# Altium PCB Oximeter.PcbDoc
Units mm, origin at the board's own origin, x right, y up, seen from the top; angles counter-clockwise.
Board outline 64.26 x 36 mm, 2 copper layers (Top Layer, Bottom Layer); 59 components, 39 nets, 184 pads, 24 vias.
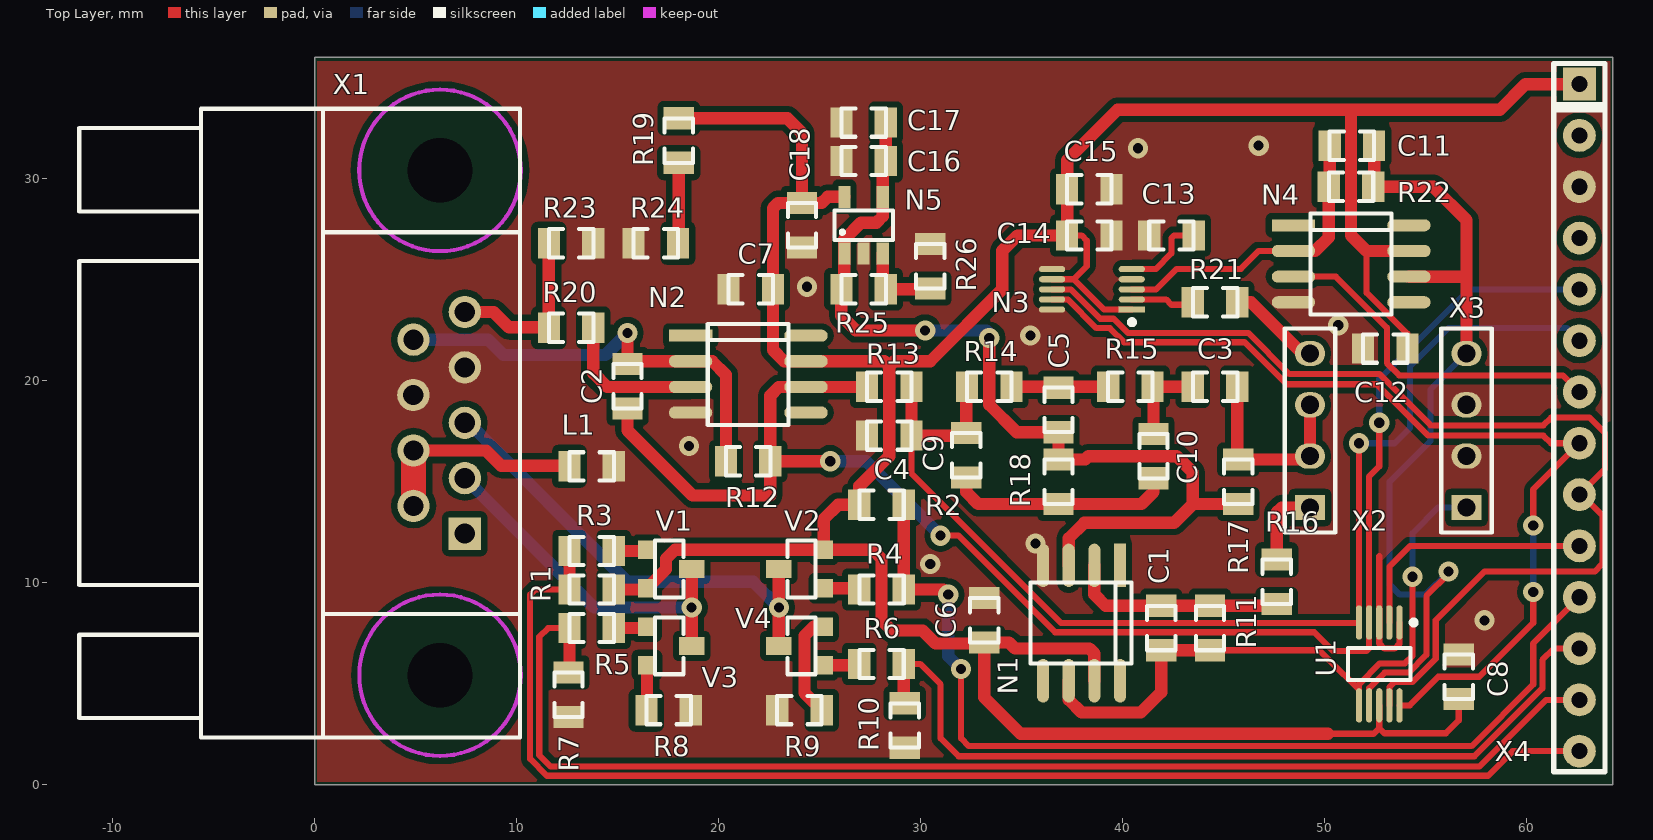
[diagram p0: Top Layer view]
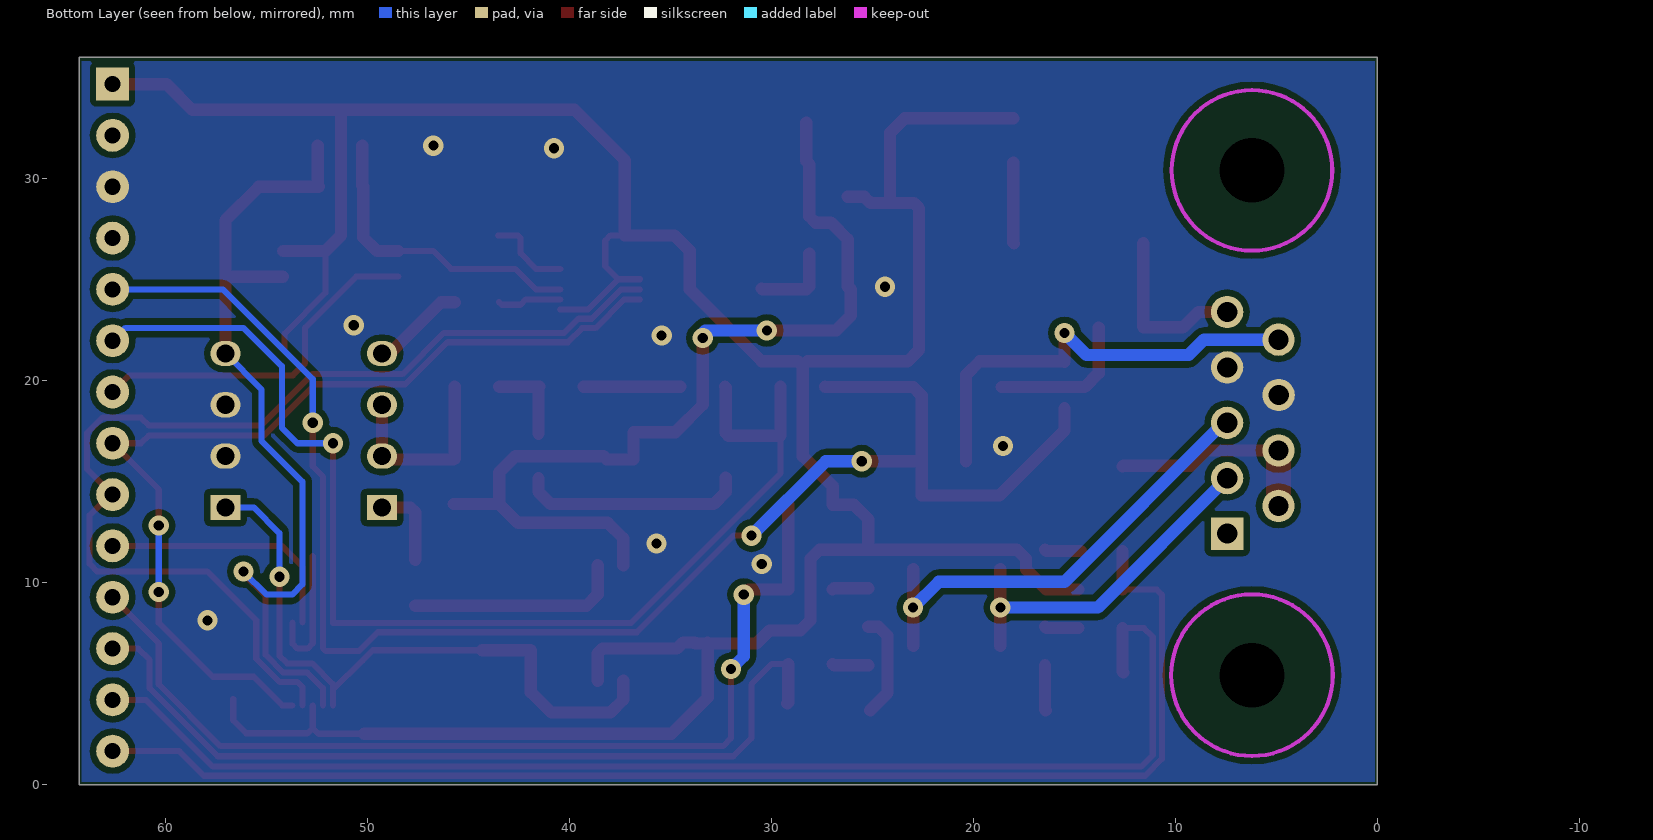
[diagram p1: Bottom Layer view, seen from below]

## Layer stack, top to bottom
Top Solder: solder mask 0.0102, Solder Resist, Dk 3.5
Top Layer: signal copper 0.0356
Dielectric 1: dielectric 0.32, FR-4, Dk 4.8
Bottom Layer: signal copper 0.0356
Bottom Solder: solder mask 0.0102, Solder Resist, Dk 3.5

## Board outline
0,0 0,36 64.262,36 64.262,0

## Design rules (kind name [scope] priority, off if disabled: settings)
Clearance [All] p1: gap=0.152 ignorepadtopadclearanceinfootprint=FALSE
DiffPairsRouting [All] p1: maxlimit=10 minlimit=0.125 mostfreqgap=0.15 toplayer_minwidth=0.381 toplayer_maxwidth=0.381 toplayer_prefwidth=0.381 bottomlayer_minwidth=0.381 bottomlayer_maxwidth=0.381 bottomlayer_prefwidth=0.381 maxuncoupledlength=12.7
FabricationTestPointUsage FabricationTestPointUsage_1 [All] p1: valid=0 allowmultiple=FALSE
FabricationTestpoint FabricationTestpoint_1 [All] p1: side=3 testpointundercomponent=TRUE minsize=1.016 maxsize=2.54 preferedsize=1.524 minholesize=0 maxholesize=1.016 preferedholesize=0.813 testpointgrid=0.025 allowsidetop=TRUE allowsidebottom=TRUE usegrid=TRUE gridtolerance=0
HoleSize [All] p1: absolutevalues=TRUE maxlimit=6 minlimit=0.33 maxpercent=80.000 minpercent=20.000
HoleSize FabricationTestpoint [All] p2 off: absolutevalues=TRUE maxlimit=2.54 minlimit=0.025 maxpercent=80.000 minpercent=20.000
HoleSize FabricationTestPointUsage [All] p3 off: absolutevalues=TRUE maxlimit=2.54 minlimit=0.025 maxpercent=80.000 minpercent=20.000
MinimumAnnularRing [All] p1: minimumring=0.178
PlaneClearance [All] p1: clearance=0.914
PlaneConnect [All] p1: planeconnectstyle=Relief reliefexpansion=0.4 reliefentries=4 reliefconductorwidth=0.15 reliefairgap=0.15
PolygonConnect [All] p1: connectstyle=Direct reliefconductorwidth=0.15 reliefentries=4 polygonreliefangle="90 Angle" airgapwidth=0.254
RoutingCorners [All] p1: cornerstyle=45-Degree minsetback=1.25 maxsetback=1.25
RoutingVias [All] p1: holewidth=0.6 width=0.8 viastyle="Through Hole" minholewidth=0.33 minwidth=0.508 maxholewidth=0.8 maxwidth=12
SolderMaskExpansion [All] p1: expansion=0.075
Width [All] p1: maxlimit=2.438 minlimit=0.152 preferedwidth=0.305
23 further rules are at their usual default settings.

## Components (designator, comment, footprint, x,y, rotation, side; value= is the part's Value field where it differs from the comment)
C1 "5n4_0805" 0805MIL 41.91,7.747 r270 top
C2 "270pF_0805" 0805MIL 15.494,19.719 r270 top
C3 "10uF_10V_GRM21" 0805MIL 44.577,19.685 r0 top
C4 "10uF_10V_GRM21" 0805MIL 28.448,17.272 r180 top
C5 "220nF_0805" 0805MIL 36.83,18.542 r270 top
C6 "100nF_0805" 0805MIL 33.147,8.128 r270 top
C7 "100nF_0805" 0805MIL 21.59,24.511 r0 top
C8 "100nF_0805" 0805MIL 56.642,5.334 r270 top
C9 "100nF_0805" 0805MIL 32.258,16.299 r270 top
C10 "100nF_0805" 0805MIL 41.529,16.256 r90 top
C11 "5n4_0805" 0805MIL 51.351,31.623 r0 top
C12 "100nF_0805" 0805MIL 53.001,21.579 r0 top
C13 "1uF_0805_100V" 0805MIL 42.418,27.178 r180 top
C14 "10uF_10V_GRM21" 0805MIL 38.354,27.178 r0 top
C15 "100nF_0805" 0805MIL 38.354,29.464 r0 top
C16 "10uF_10V_GRM21" 0805MIL 27.178,30.861 r180 top
C17 "100nF_0805" 0805MIL 27.178,32.766 r0 top
C18 "100nF_0805" 0805MIL 24.13,27.686 r90 top
L1 "39E" 0805MIL 13.716,15.748 r0 top
N1 "OPA333" SOP8_150_65 37.973,8.001 r180 top
N2 "OPA333" SOP8_150_65 21.463,20.32 r270 top
N3 "AD5272" MSOP10 38.481,24.511 r90 top
N4 "OPA333" SOP8_150_65 51.308,25.781 r270 top
N5 "TLV2371IDBVR" SOT23-5 27.178,27.689 r0 top
R1 "10K_0805C" 0805MIL 13.716,9.652 r180 top
R2 "10K_0805C" 0805MIL 28.067,13.843 r0 top
R3 "1K_0805C" 0805MIL 13.716,11.557 r180 top
R4 "1K_0805C" 0805MIL 28.067,9.652 r180 top
R5 "27K_0805C" 0805MIL 13.716,7.747 r180 top
R6 "27K_0805C" 0805MIL 28.067,5.969 r180 top
R7 "10K_0805C" 0805MIL 12.573,4.445 r270 top
R8 "20E_0805C" 0805MIL 17.526,3.683 r0 top
R9 "20E_0805C" 0805MIL 24.003,3.683 r180 top
R10 "10K_0805C" 0805MIL 29.21,2.921 r270 top
R11 "6M8_0805C" 0805MIL 44.323,7.747 r90 top
R12 "4M7_0805C" 0805MIL 21.463,16.002 r180 top
R13 "3K9_0805C" 0805MIL 28.448,19.685 r180 top
R14 "33K_0805C" 0805MIL 33.401,19.685 r180 top
R15 "33K_0805C" 0805MIL 40.386,19.685 r180 top
R16 "150K_0805C" 0805MIL 47.625,10.033 r90 top
R17 "33K_0805C" 0805MIL 45.72,14.986 r270 top
R18 "15K_0805C" 0805MIL 36.83,14.986 r270 top
R19 "10K_0805C" 0805MIL 18.034,31.877 r270 top
R20 "0E0_0805C" 0805MIL 12.7,22.606 r180 top
R21 "56K_0805C" 0805MIL 44.577,23.876 r180 top
R22 "6M8_0805C" 0805MIL 51.308,29.591 r180 top
R23 "0E0_0805C" 0805MIL 12.7,26.797 r0 top
R24 "1K2_0805C" 0805MIL 16.891,26.797 r180 top
R25 "10K_0805C" 0805MIL 27.178,24.511 r0 top
R26 "10K_0805C" 0805MIL 30.48,25.654 r90 top
U1 "ADS1115IDGST" TI-DGS10_N 52.705,5.969 r270 top
V1 "BC807-25" SOT23 17.653,10.668 r270 top
V2 "BC807-25" SOT23 24.003,10.668 r90 top
V3 "MMBT3904" SOT23 17.653,6.858 r270 top
V4 "MMBT3904" SOT23 24.003,6.858 r90 top
X1 "D-SUB9_S_ABG" DSUB_9_F_ABG 2.54,17.907 r270 top
X2 "SL1-053-04G" SL105304 49.276,13.716 r90 top
X3 "SL1-053-04G" SL105304 57.023,13.716 r90 top
X4 "X-14P" SIP14 62.611,34.671 r270 top

## Footprints (in the part's own frame and the unit in brackets; to place one, negate y for a bottom-side part, rotate by r counter-clockwise, add the part's x,y. Pads: shape width x height; smd on the part's side, far side on the other; paste and mask are expansions set on the pad)
0805MIL [mm] "0805MIL"
  rect 1.1x1.5 smd: 1(-1.1,0) 2(1.1,0)
  silkscreen extent -1.1,-0.7 1.1,0.7, body extent -1.1,-0.7 1.1,0.7, height 0.6
DSUB_9_F_ABG [mm] "DSUB_9_F_ABG"
  rect 1.6x1.6 hole 1: 1(5.487,4.9)
  round 1.6 hole 1: 2(2.744,4.9) 3(0.001,4.9) 4(-2.743,4.9) 5(-5.486,4.9) 6(4.115,2.36) 7(1.372,2.36) 8(-1.371,2.35) 9(-4.114,2.36)
  round 0 hole 3.2: ""(-12.496,3.672)
  round 0 hole 3.2 unplated: ""(12.497,3.672)
  Top Layer keep-out circle w0.2: c12.497,3.672 r3.997
  Top Layer keep-out circle w0.2: c-12.496,3.672 r4
  Bottom Layer keep-out circle w0.2: c12.497,3.672 r4
  Bottom Layer keep-out circle w0.2: c-12.496,3.672 r3.974
  silkscreen extent -15.54,-14.19 15.57,7.64, body extent -15.47,-14.17 15.43,7.62, height 13.65
MSOP10 [mm] "MSOP10"
  rect 0.3x1.3 smd: 1(-1,-1.975)
  oval 0.3x1.3 smd: 2(-0.5,-1.975) 3(0,-1.975) 4(0.5,-1.975) 5(1,-1.975) 6(1,1.975) 7(0.5,1.975) 8(0,1.975) 9(-0.5,1.975) 10(-1,1.975)
  silkscreen extent -1.75,-2.11 -1.5,-1.86, body extent -1.5,-2.46 1.5,2.46, height 1.2
SIP14 [mil]
  rect 64x64 hole 31.5: 1(0,0)
  round 64 hole 31.5: 2(100,0) 3(200,0) 4(300,0) 5(400,0) 6(500,0) 7(600,0) 8(700,0) 9(800,0) 10(900,0) 11(1000,0) 12(1100,0) 13(1200,0) 14(1300,0)
  silkscreen extent -40,-50 1340,50
SL105304 [mm] "SL105304"
  rect 1.25x1.5 hole 0.9: 1(0,0)
  oval 1.25x1.5 hole 0.9: 2(2.54,0) 3(5.08,0) 4(7.62,0)
  silkscreen extent -1.25,-1.25 8.85,1.25, body extent -1.28,-1.25 8.88,1.25, height 8.1
SOP8_150_65 [mm] "SOP8_150_65"
  rect 0.6x2.15 smd: 1(-1.9,-2.85)
  oval 0.6x2.15 smd: 2(-0.63,-2.85) 3(0.64,-2.85) 4(1.91,-2.85) 5(1.91,2.865) 6(0.64,2.865) 7(-0.63,2.865) 8(-1.9,2.865)
  silkscreen extent -2.47,-2 2.52,2, body extent -2.47,-3.07 2.53,3.12, height 1.73
SOT23 [mm] "SOT23"
  rect 0.9x0.9 smd: 1(-0.95,-1.2) 2(0.955,-1.2)
  rect 0.9x1.25 smd: 3(0.002,1.022)
  silkscreen extent -1.4,-0.8 1.4,0.6, body extent -1.46,-1.27 1.46,1.07, height 0.99
SOT23-5 [mm] "SOT23-5"
  rect 0.6x1.1 smd: 1(-0.95,-1.4) 2(0,-1.4) 3(0.95,-1.4) 4(0.95,1.4) 5(-0.95,1.4)
  silkscreen extent -1.44,-0.72 1.45,0.72, body extent -1.5,-1.5 1.5,1.5, height 1.47
TI-DGS10_N [mm] "SOP, 10-Leads, Body 3x3mm, Pitch 0.5mm, IPC Medium Density"
  oval 1.7x0.3 smd: 1(-2.05,1) 2(-2.05,0.5) 3(-2.05,0) 4(-2.05,-0.5) 5(-2.05,-1) 6(2.05,-1) 7(2.05,-0.5) 8(2.05,0) 9(2.05,0.5) 10(2.05,1)
  silkscreen extent -2.17,-1.55 0.8,1.83, body extent -1.55,-1.55 1.55,1.55, height 1.1

## Part data
C1 C11: library part 2506.1521, "Kond.Keramik SMD Typ X7R 2,2nF B37941-K5222-K60 0805", Manufacturer=Epcos, Supplier Part Number 1="83 06 56", Tolerance=10%, Voltage=50V, #Footprint Old#=0805MIL, ComponentLink1Description=Datasheet, ComponentLink1URL=P:\Datasheets\Kondensatoren\B37xxkeramik.pdf, IEC=CKE, Part Grp=VIII, Part Number=2506.1521, Part Type=Keramik\SMD, ROHS=Nein, SMD=Ja, Supplier 1=Distrelec
C2: library part 2506.1509, "Kond.Keramik Siemens Typ COG SMD 0805", Manufacturer=Siemens, #Footprint Old#=0805MIL, ComponentLink1Description=Datasheet, ComponentLink1URL=P:\Datasheets\Kondensatoren\KERKOND.pdf, IEC=CKE, Part Grp=VIII, Part Number=2506.1509, Part Type=Keramik\SMD, ROHS=Nein, SMD=Ja
C3 C4 C14 C16: library part 2541.8615, "Monolithic Ceramic Capacitor 10uF/10V GRM21BR61A106KE19L", Manufacturer=MyRata, Manufacturer Part Nr=GRM21BR61A106KE19L, Supplier Part Number 1="82 35 11", Tolerance=10%, Voltage=10V, #Footprint Old#=0805MIL, ComponentLink1Description=Datasheet, ComponentLink1URL=P:\Datasheets\Kondensatoren\GRM319.pdf, IEC=CKE, Part Grp=VIII, Part Number=2541.8615, Part Type=Keramik\SMD, ROHS=Nein, SMD=Ja, Supplier 1=Distrelec
C5: library part 2506.1529, "Kond.Keramik Siemens Typ X7R SMD 0805", Manufacturer=Siemens, Supplier Part Number 1="83 14 67", #Footprint Old#=0805MIL, ComponentLink1Description=Datasheet, ComponentLink1URL=P:\Datasheets\Kondensatoren\KERKOND.pdf, IEC=CKE, Part Grp=VIII, Part Number=2506.1529, Part Type=Keramik\SMD, ROHS=Nein, SMD=Ja, Supplier 1=Distrelec
C6 C7 C8 C9 C10 C12 C15 C17 C18: library part 2504.0981, "Kond.Keramik Typ X7R SMD 0805 100nF", Manufacturer=Kemet, Supplier Part Number 1="83 14 69", Tolerance=10%, Voltage=50V, #Footprint Old#=0805MIL, ComponentLink1Description=Datasheet, ComponentLink1URL=P:\Datasheets\Kondensatoren\Kemet-keramik.pdf, IEC=CKE, Part Grp=VIII, Part Number=2504.0981, Part Type=Keramik\SMD, ROHS=Nein, SMD=Ja, Supplier 1=Distrelec
C13: library part 2567.7027, "Kond.Keramik TDK Typ X7S SMD 0805 1uF/100V", Manufacturer=TDK, Manufacturer Part Nr=C2012X7S2A105K125AB, Max Operating Temp=125, Min Operating Temp=-55, Supplier Part Number 1=211-2709, ComponentLink1Description=Datasheet, ComponentLink1URL=P:\Datasheets\Kondensatoren\TDK_CHIP.pdf, IEC=CKE, Part Number=2567.7027, Part Type=Keramik, ROHS=Ja, SMD=Ja, Supplier 1=Farnell
L1: library part 2571.6206, "SMD Ferrit MPZ2012S331A 330Ohm", Manufacturer=TDK, Manufacturer Part Nr=MPZ2012S331A, Max Operating Temp=125, Min Operating Temp=-55, Supplier Part Number 1=810-MPZ2012S331AT000, ComponentLink1Description=Datasheet, ComponentLink1URL="P:\Datasheets\Ferrite\TDK_MPZ Serie.pdf", IEC=LFE, Part Grp=V, Part Number=2571.6206, Part Type=Ferrit, ROHS=Ja, SMD=Ja, Supplier 1=Mouser
N1 N2 N4: library part 2564.2212, "SMD Low Power Precision Op.Amp. OPA211AIDR SOIC8", Manufacturer="Texas Instruments", Manufacturer Part Nr=OPA211AIDR, Max Operating Temp=150, Min Operating Temp=-55, #Footprint Old#=SOIC_8, ComponentLink1Description=Datasheet, ComponentLink1URL=P:\Datasheets\Analoge_Schaltungen\OPA211.pdf, IEC=NOP, NC=1,5,8, Part Grp=I, Part Number=2564.2212, Part Type=Signalverarbeitung\Operationsverstaerker, ROHS=Ja, SMD=Ja, Supplier 1=Digikey, Supplier Part Number 1=OPA211AIDR
N3: library part N-AD5272, "Digitalpotentiometer 1024tap 100k", Text Field1="Op.Amp. / Offset corr.n / Freqency comp."
N5: library part 8015.8017, "3MHz Rail-to-Rail OpAmp TLV2371IDBVR SOT23-5", Manufacturer="Texas Instruments", Supplier Part Number 1=595-TLV2371IDBVR, ComponentLink1Description=Datasheet, ComponentLink1URL=P:\Datasheets\Analoge_Schaltungen\TLV2371.pdf, IEC=NOP, Manufacturer Part Nr=TLV2371IDBVR, Part Grp=I, Part Number=8015.8017, Part Type=Signalverarbeitung\Operationsverstaerker, ROHS=Ja, SMD=Ja, Supplier 1=Mouser
R1 R2 R7 R10 R19 R25 R26: library part 2522.1838, "Widerst.Chip SMD 1% 0.1W 0805 Serie HMWA 10 kOhm", Manufacturer="Royal Ohm", Supplier Part Number 1=911-975, #Footprint Old#=0805MIL, ComponentLink1Description=Datasheet, ComponentLink1URL=P:\Datasheets\Widerstaende\Chip_0805.pdf, IEC=RSH, Part Grp=XII, Part Number=2522.1838, Part Type=Schichtwiderstand\SMD, ROHS=Nein, SMD=Ja, Supplier 1=Farnell
R3 R4: library part 2522.1806, "Widerst.Chip SMD 1% 0.1W 0805 Serie HMWA 1 kOhm", Manufacturer="Royal Ohm", Supplier Part Number 1=911-859, #Footprint Old#=0805MIL, ComponentLink1Description=Datasheet, ComponentLink1URL=P:\Datasheets\Widerstaende\Chip_0805.pdf, IEC=RSH, Part Grp=XII, Part Number=2522.1806, Part Type=Schichtwiderstand\SMD, ROHS=Nein, SMD=Ja, Supplier 1=Farnell
R5 R6: library part 2522.1849, "Widerst.Chip SMD 1% 0.1W 0805 Serie HMWA 27 kOhm", Manufacturer="Royal Ohm", Supplier Part Number 1=912-025, #Footprint Old#=0805MIL, ComponentLink1Description=Datasheet, ComponentLink1URL=P:\Datasheets\Widerstaende\Chip_0805.pdf, IEC=RSH, Part Grp=XII, Part Number=2522.1849, Part Type=Schichtwiderstand\SMD, ROHS=Nein, SMD=Ja, Supplier 1=Farnell
R8 R9: library part 2544.3651, "Widerst.Chip SMD 0.1% 0.1W 0805 Serie RN73 20 Ohm", Manufacturer=TYCO/Holsworthy, Supplier Part Number 1=114-0651, #Footprint Old#=0805MIL, ComponentLink1Description=Datasheet, ComponentLink1URL=P:\Datasheets\Widerstaende\Chip_0805_RN73.pdf, IEC=RSH, Part Grp=XII, Part Number=2544.3651, Part Type=Schichtwiderstand\SMD, ROHS=Nein, SMD=Ja, Supplier 1=Farnell
R11 R12 R22: library part 2522.1895, "Widerst.Chip SMD 1% 0.1W 0805 Serie HMWA 1 MOhm", Manufacturer="Royal Ohm", Supplier Part Number 1=912-219, #Footprint Old#=0805MIL, ComponentLink1Description=Datasheet, ComponentLink1URL=P:\Datasheets\Widerstaende\Chip_0805.pdf, IEC=RSH, Part Grp=XII, Part Number=2522.1895, Part Type=Schichtwiderstand\SMD, ROHS=Nein, SMD=Ja, Supplier 1=Farnell
R13: library part 2522.1824, "Widerst.Chip SMD 1% 0.1W 0805 Serie HMWA 3,9 kOhm", Manufacturer="Royal Ohm", Supplier Part Number 1=911-926, #Footprint Old#=0805MIL, ComponentLink1Description=Datasheet, ComponentLink1URL=P:\Datasheets\Widerstaende\Chip_0805.pdf, IEC=RSH, Part Grp=XII, Part Number=2522.1824, Part Type=Schichtwiderstand\SMD, ROHS=Nein, SMD=Ja, Supplier 1=Farnell
R14 R15 R17: library part 2522.1851, "Widerst.Chip SMD 1% 0.1W 0805 Serie HMWA 33 kOhm", Manufacturer="Royal Ohm", Supplier Part Number 1=912-037, #Footprint Old#=0805MIL, ComponentLink1Description=Datasheet, ComponentLink1URL=P:\Datasheets\Widerstaende\Chip_0805.pdf, IEC=RSH, Part Grp=XII, Part Number=2522.1851, Part Type=Schichtwiderstand\SMD, ROHS=Nein, SMD=Ja, Supplier 1=Farnell
R16: library part 2522.1871, "Widerst.Chip SMD 1% 0.1W 0805 Serie HMWA 150 kOhm", Manufacturer="Royal Ohm", Supplier Part Number 1=912-166, #Footprint Old#=0805MIL, ComponentLink1Description=Datasheet, ComponentLink1URL=P:\Datasheets\Widerstaende\Chip_0805.pdf, IEC=RSH, Part Grp=XII, Part Number=2522.1871, Part Type=Schichtwiderstand\SMD, ROHS=Nein, SMD=Ja, Supplier 1=Farnell
R18: library part 2522.1843, "Widerst.Chip SMD 1% 0.1W 0805 Serie HMWA 15 kOhm", Manufacturer="Royal Ohm", Supplier Part Number 1=911-999, #Footprint Old#=0805MIL, ComponentLink1Description=Datasheet, ComponentLink1URL=P:\Datasheets\Widerstaende\Chip_0805.pdf, IEC=RSH, Part Grp=XII, Part Number=2522.1843, Part Type=Schichtwiderstand\SMD, ROHS=Nein, SMD=Ja, Supplier 1=Farnell
R20 R23: library part 2524.7986, "Widerst.Chip SMD 1% 0.1W 0805 Serie HMWA 0Ohm", Manufacturer="Royal Ohm", Supplier Part Number 1=772-239, #Footprint Old#=0805MIL, ComponentLink1Description=Datasheet, ComponentLink1URL=P:\Datasheets\Widerstaende\Chip_0805.pdf, IEC=RSH, Part Grp=XII, Part Number=2524.7986, Part Type=Schichtwiderstand\SMD, ROHS=Nein, SMD=Ja, Supplier 1=Farnell
R21: library part 2522.1858, "Widerst.Chip SMD 1% 0.1W 0805 Serie HMWA 56 kOhm", Manufacturer="Royal Ohm", Supplier Part Number 1=912-062, #Footprint Old#=0805MIL, ComponentLink1Description=Datasheet, ComponentLink1URL=P:\Datasheets\Widerstaende\Chip_0805.pdf, IEC=RSH, Part Grp=XII, Part Number=2522.1858, Part Type=Schichtwiderstand\SMD, ROHS=Nein, SMD=Ja, Supplier 1=Farnell
R24: library part 2522.1809, "Widerst.Chip SMD 1% 0.1W 0805 Serie HMWA 1,2 kOhm", Manufacturer="Royal Ohm", Supplier Part Number 1=911-860, #Footprint Old#=0805MIL, ComponentLink1Description=Datasheet, ComponentLink1URL=P:\Datasheets\Widerstaende\Chip_0805.pdf, IEC=RSH, Part Grp=XII, Part Number=2522.1809, Part Type=Schichtwiderstand\SMD, ROHS=Nein, SMD=Ja, Supplier 1=Farnell
U1: "16-Bit ADC with Integrated Multiplexer, PGA, Comparator, Oscillator, and Reference, -40 to 125 degC, 10-pin SOP (DGS10), Green (RoHS & no Sb/Br)", Analog Voltage AV/DD(Max)(V)=5.5, Analog Voltage AV/DD(Min)(V)=2, Manufacturer="Texas Instruments", Supplier Part Number 1=ADS1253E/2K5G4-ND, # Input Channels=4, Architecture=Delta-Sigma, Code_JEDEC=MO-153, ComponentLink1Description="Manufacturer URL", ComponentLink1URL=http://www.ti.com/, ComponentLink2Description=Datasheet, ComponentLink2URL=http://www.ti.com/general/docs/lit/getliterature.tsp?genericPartNumber=ADS1115&fileType=pdf, ComponentLink3Description="Package Specification", ComponentLink3URL=http://www.ti.com/lit/ml/mpds035b/mpds035b.pdf, DatasheetVersion=SBAS444B, Digital Supply(Max)(V)=5.5, Digital Supply(Min)(V)=2, Eco-Plan="Green (RoHS & no Sb/Br)", INL(Max)(+/-LSB)=1, Interface="Serial I2C", Mounting Technology="Surface Mount", PackageDescription="10-Pin Plastic Small Outline, Body 3 x 3 mm, Pitch 0.5 mm", PackageReference=DGS10, PackageVersion="4073272/C, 02/2004", PartNumber=ADS1115IDGST, Resolution(Bits)=16, Sample Rate (max)(SPS)=860, SubFamily="Precision ADC (<=10MSPS)", Supplier 1=Digi-Key, Supplier 2=Mouser, Supplier Part Number 2=595-ADS1253E/2K5G4
V1 V2: library part 2110.8189, "PNP-Transistor SMD BC807-25 SOT-23", Manufacturer=NXP, Supplier Part Number 1=108-1221, #Footprint Old#=SOT23, ComponentLink1Description=Datasheet, ComponentLink1URL=P:\Datasheets\Diskrete_Halbleiter\BC807.pdf, IEC=VPN, Manufacturer Part Nr=BC807-25, Part Grp=III, Part Number=2110.8189, Part Type=Transistoren\PNP, ROHS=Ja, SMD=Ja, Supplier 1=Farnell
V3 V4: library part 2544.3690, "Transistor NPN MMBT3904 SOT-23", Manufacturer=Fairchild, Supplier Part Number 1=984-6727, #Footprint Old#=SOT23, ComponentLink1Description=Datasheet, ComponentLink1URL=P:\Datasheets\Diskrete_Halbleiter\MMBT3904.pdf, Date=07.09.2015, IEC=VNP, Name=rlegm, Part Grp=III, Part Number=2544.3690, Part Type=Transistoren\NPN, ROHS=Nein, SMD=Ja, Supplier 1=Farnell
X1: library part 2570.6888, "D-SUB 9 Sok 90° mit Winkel und Abstandsbolzen DT09SYC1M63UNB6", Manufacturer=Deltron, Manufacturer Part Nr=DT09SYC1M63UNB6, ComponentLink1Description=Datasheet, ComponentLink1URL=P:\Datasheets\Elektromechanik\Deltron_DSUB_ABG.pdf, IEC=XDS, Part Grp=IV, Part Number=2570.6888, Part Type=Steckerverbinder\D-SUB, ROHS=Ja, SMD=Nein, Supplier 1=Deltron, Supplier Part Number 1=DT09SYC1M63UNB6
X2 X3: library part 2552.7782, "2.54mm Stiftleiste 1reihig 4pol gerade SL1 053 04G", Manufacturer=Fischer, Max Operating Temp=105, Min Operating Temp=-40, Supplier Part Number 1="SL1 053 04G", #Footprint Old#=SL4X1_254, ComponentLink1Description=Datasheet, ComponentLink1URL=P:\Datasheets\Elektromechanik\SL1_053.pdf, IEC=XDI, Manufacturer Part Nr=SL1-053-04G, Part Grp=IV, Part Number=2552.7782, Part Type=Steckerverbinder, ROHS=Ja, SMD=Nein, Supplier 1=Astrel
X4: "Stiftenleiste 14 pin"

## Via types
v1: diameter 1, hole 0.5, Top Layer to Bottom Layer, 24 vias

## Nets (pads, with @x,y where several pads share a name; then routed paths per layer and width w, separated by ;. In a path a pad name is that pad's centre, name@x,y a point inside that pad or via, vN(x,y) a via of type N, cw(c..) or ccw(c..) an arc to the next point about the centre after c; other vN are vias at no path point)
Baseline: C4.1 C9.1 R13.1 R14.2 U1.5 X4.6 | length 58.8
  Top Layer w0.305: C4.1 29.548,15.41 36.966,7.992 U1.5@51.705,7.992 ; U1.5 v1(51.705,16.891)
  Top Layer w0.61: R13.1 C4.1 32.131,17.272 C9.1 32.258,19.642 R14.2
  Bottom Layer w0.305: v1(51.705,16.891) 53.467,16.891 54.229,17.653 54.229,20.701 56.134,22.606 61.976,22.606 X4.6
Current_IR: R6.1 R10.1 X4.12 | length 41.9
  Top Layer w0.305: R6.1 29.972,5.969 30.988,4.953 30.988,2.286 31.877,1.397 57.416,1.397 60.782,4.764 60.782,6.172 61.341,6.731 X4.12
  Top Layer w0.61: R6.1 29.167,4.064 R10.1
Current_Red: R5.2 R7.1 X4.13 | length 62.8
  Top Layer w0.305: R5.2 11.557,7.747 11.125,7.315 11.125,1.459 11.696,0.889 57.658,0.889 60.96,4.191 X4.13
  Top Layer w0.61: R7.1 12.616,5.588 R5.2
DSUB_P2: V1.3 V3.3 X1.2 | length 17.7
  Top Layer w0.61: V3.3 V1.3
  Bottom Layer w0.61: X1.2 13.84,8.763 v1(18.669,8.763)
DSUB_P3: V2.3 V4.3 X1.3 | length 23.1
  Top Layer w0.61: V4.3 V2.3
  Bottom Layer w0.61: X1.3@7.531,17.996 15.494,10.033 21.717,10.033 v1(22.987,8.763)
GND: C4.2 C6.1 C7.1 C8.1 C12.1 C13.2 C14.2 C15.2 C16.2 C17.1 C18.1 L1.2 N1.4 N2.4 N3.4 N3.6 N3.10 N4.4 N5.2 R7.2 R8.2 R9.2 R10.2 R23.2 R24.2 R26.2 U1.1 U1.3 X1.4 X1.8 X3.2 X3.3 X4.3 | length 6.6
  Top Layer w0.305: 52.705,11.303 U1.3 52.705,6.985 52.959,6.731 53.467,6.731 53.705,6.969 U1.1
  other v1: 57.912,8.128 30.48,10.922 35.687,11.938 18.542,16.764 35.433,22.225 50.673,22.733 24.384,24.638 40.767,31.496 46.736,31.623
NetC1_1: C1.1 N1.2 R11.2 R16.1 | length 10.7
  Top Layer w0.61: N1.2 38.603,9.403 39.159,8.847 C1.1 R11.2 R16.1@47.625,8.847
NetC1_2: C1.2 N1.6 R11.1 U1.6 X3.1 | length 32.4
  Top Layer w0.305: R11.1 49.729,6.647 50.23,6.147 50.241,6.147 U1.6@51.705,4.683 ; U1.6 U1.6@51.705,4.683 ; v1(54.356,10.287) 54.356,6.373 53.977,5.994 52.73,5.994 51.705,4.969 U1.6@51.705,4.683
  Top Layer w0.61: N1.6 37.333,4.196 37.968,3.561 40.899,3.561 41.91,4.572 C1.2 R11.1
  Bottom Layer w0.305: v1(54.356,10.287) 54.356,12.446 55.626,13.716 X3.1
NetC2_1: C2.1 N2.2 R12.2 X1.9 | length 22.2
  Top Layer w0.61: v1(15.494,22.352) 15.494,20.912 15.532,20.95 N2.2 19.69,20.95 20.363,20.277 R12.2
  Bottom Layer w0.61: X1.9 8.586,22.021 9.348,21.259 14.401,21.259 v1(15.494,22.352)
NetC3_1: C3.1 C10.2 R15.1 | length 4.3
  Top Layer w0.61: C10.2 41.529,19.642 R15.1 C3.1
NetC3_2: C3.2 R17.1 X2.2 X2.3 | length 9.8
  Top Layer w0.61: C3.2 45.677,16.129 R17.1 49.106,16.086 X2.2 X2.3
NetC5_1: C5.1 R14.1 R15.2 | length 4.8
  Top Layer w0.61: R14.1 R15.2
NetC9_2: C9.2 C10.1 R18.2 | length 11.2
  Top Layer w0.61: C9.2 32.258,14.478 32.85,13.886 R18.2 40.937,13.886 41.529,14.478 C10.1
NetC11_1: C11.1 N3.3 N4.2 R22.2 | length 15.4
  Top Layer w0.305: N3.3 41.656,24.511 42.672,25.527 45.847,25.527 46.731,26.411 N4.2
  Top Layer w0.61: N4.2 49.525,26.411 50.208,27.094 R22.2 50.251,29.634 C11.1
NetC11_2: C11.2 N4.6 R22.1 U1.7 X3.4 | length 42.4
  Top Layer w0.305: U1.7 52.205,4.762 52.98,5.537 54.167,5.537 55.042,6.412 55.042,9.333 56.134,10.426 v1(56.134,10.541)
  Top Layer w0.61: C11.2 52.451,29.634 R22.1 55.372,29.591 57.023,27.94 57.023,25.146 ; N4.6 57.018,25.141 57.023,25.146 ; X3.4 57.023,25.146
  Bottom Layer w0.305: v1(56.134,10.541) 54.991,9.398 53.721,9.398 53.213,9.906 53.213,14.986 55.245,17.018 55.245,19.558 X3.4
NetC13_1: C13.1 N3.5 | length 4.2
  Top Layer w0.305: N3.5 41.64,25.511 42.418,26.289 42.418,27.051 42.545,27.178 C13.1
NetL1_1: L1.1 X1.6 X1.7 | length 10.8
  Top Layer w0.61: X1.7 8.484,16.535 9.246,15.773 12.591,15.773 L1.1
  Top Layer w1.219: X1.6 X1.7
NetN2_3: N2.3 R20.1 | length 7.3
  Top Layer w0.61: R20.1 13.8,20.363 14.483,19.68 N2.3
NetN3_2: N3.2 R21.2 | length 3.2
  Top Layer w0.305: N3.2 42.156,24.011 42.418,23.749 43.35,23.749 R21.2
NetN5_3: N5.3 R25.2 R26.1 | length 4.1
  Top Layer w0.61: N5.3 28.128,24.661 R25.2 30.437,24.511 R26.1
NetR3_1: R3.1 V1.1 | length 1.8
  Top Layer w0.61: R3.1@14.689,11.557 R3.1 16.392,11.557 V1.1
NetR4_2: R4.2 V2.1 | length 1.8
  Top Layer w0.61: V2.1 26.901,9.718 R4.2
NetR5_1: R5.1 V3.1 | length 1.7
  Top Layer w0.61: R5.1 16.392,7.747 V3.1
NetR6_2: R6.2 V4.1 | length 1.8
  Top Layer w0.61: V4.1 26.906,5.908 R6.2
NetR8_1: R8.1 V3.2 | length 2.2
  Top Layer w0.61: R8.1 16.453,3.71 V3.2
NetR9_1: R9.1 V4.2 | length 5.2
  Top Layer w0.61: R9.1 24.257,4.529 24.257,7.366 24.704,7.813 V4.2
NetR16_2: R16.2 X2.1 | length 4.1
  Top Layer w0.61: R16.2 47.625,13.462 47.879,13.716 X2.1
NetR19_2: R19.2 R24.1 | length 4
  Top Layer w0.61: R24.1 18.034,26.84 R19.2
NetR20_2: R20.2 R23.1 X1.5 | length 8.6
  Top Layer w0.61: X1.5 8.865,23.393 9.627,22.631 11.575,22.631 11.6,22.656 R23.1
NetR21_1: R21.1 X2.4 | length 4.7
  Top Layer w0.61: R21.1 46.355,23.876 48.895,21.336 X2.4
Offset_Voltage: N4.3 X4.7 | length 17.5
  Top Layer w0.305: N4.3 50.56,25.141 53.086,22.615 53.086,20.863 53.695,20.254 61.788,20.254 X4.7
RDY: U1.2 X4.10 | length 12.6
  Top Layer w0.305: U1.2 53.205,10.787 54.229,11.811 X4.10
SCL: N3.9 U1.10 X4.8 | length 47.2
  Top Layer w0.305: N3.9 37.291,24.011 38.705,22.597 39.368,22.597 40.07,21.895 46.039,21.895 48.121,19.812 52.578,19.812 55.118,17.272 60.833,17.272 61.214,16.891 X4.8 60.325,14.605 v1(60.325,12.827) ; U1.10 54.211,3.919 55.626,5.334 57.658,5.334 60.325,8.001 v1(60.325,9.525)
  Bottom Layer w0.305: v1(60.325,9.525) v1(60.325,12.827)
SDA: N3.8 U1.9 X4.9 | length 53.3
  Top Layer w0.305: N3.8 37.437,24.511 38.895,23.054 39.557,23.054 40.259,22.352 46.228,22.352 48.26,20.32 52.717,20.32 55.257,17.78 60.833,17.78 61.214,18.161 63.119,18.161 63.881,17.399 63.881,15.621 X4.9 62.738,14.351 63.754,13.335 63.754,10.922 63.373,10.541 57.912,10.541 55.499,8.128 55.499,6.223 54.356,5.08 53.467,5.08 53.205,4.818 U1.9
SW_LED_IR: R1.2 R3.2 X4.14 | length 64.9
  Top Layer w0.305: R1.2 10.922,9.652 10.668,9.398 10.668,1.27 11.506,0.432 58.09,0.432 59.309,1.651 X4.14
  Top Layer w0.61: R1.2 R3.2
SW_LED_Red: R2.2 R4.1 X4.11 | length 48.9
  Top Layer w0.305: v1(32.004,5.715) 32.004,2.286 32.385,1.905 57.277,1.905 60.325,4.953 60.325,6.985 X4.11
  Top Layer w0.61: R2.2 R4.1 31.115,9.652 v1(31.369,9.398)
  Bottom Layer w0.61: v1(31.369,9.398) 31.369,6.35 v1(32.004,5.715)
TIA_Out: C2.2 N2.6 R12.1 R13.2 U1.4 X4.5 | length 78.3
  Top Layer w0.305: v1(30.988,12.319) 31.877,12.319 36.661,7.535 49.488,7.535 50.419,6.604 52.07,6.604 52.205,6.739 U1.4 52.205,15.248 52.705,15.748 v1(52.705,17.907)
  Top Layer w0.61: C2.2 15.494,17.526 18.712,14.308 22.563,14.308 R12.1 ; v1(25.527,16.002) R12.1 ; R13.2 27.343,19.68 N2.6 22.982,19.68 22.563,19.261 R12.1
  Bottom Layer w0.305: v1(52.705,17.907) 52.705,20.066 57.15,24.511 X4.5
  Bottom Layer w0.61: v1(25.527,16.002) 27.305,16.002 v1(30.988,12.319)
VDD: C6.2 C7.2 C8.2 C12.2 C14.1 C15.1 C18.2 N1.7 N2.7 N3.1 N3.7 N4.7 N5.5 R1.1 R2.1 R19.1 U1.8 V1.2 V2.2 X4.1 | length 163.8
  Top Layer w0.305: N3.7 37.584,25.011 ; C14.1 37.973,27.178 38.227,26.924 38.227,25.654 37.584,25.011 ; N3.1 39.084,23.511 37.584,25.011 ; 50.165,2.515 52.426,2.515 52.705,2.794 ; 52.075,26.411 52.075,24.339 54.101,22.313 C12.2 ; U1.8 52.705,2.794 ; C8.2 56.642,3.175 56.007,2.54 52.959,2.54 52.705,2.794
  Top Layer w0.61: R1.1 16.392,9.652 V1.2 17.399,10.659 17.399,11.176 17.846,11.623 V2.2 ; R19.1 23.411,32.977 24.13,32.258 C18.2 ; N5.5 25.406,29.089 25.103,28.786 C18.2 ; C6.2 C6.2@33.147,6.985 ; C6.2@33.782,6.985 C6.2@33.147,6.985 ; C6.2@33.782,7.028 34.374,7.028 34.671,6.731 38.354,6.731 38.603,6.482 N1.7 ; 50.165,2.515 34.95,2.515 33.147,4.318 C6.2@33.147,6.985 ; N4.7 52.075,26.411 51.308,27.178 51.308,33.401 ; X4.1 59.944,34.671 58.674,33.401 51.308,33.401 ; C18.2 22.944,28.786 22.69,28.532 C7.2 22.69,21.506 23.246,20.95 N2.7 28.199,20.95 28.448,20.701 ; V2.2 25.203,13.138 25.908,13.843 R2.1 26.967,14.775 28.448,16.256 28.448,20.701 ; V2.2 27.62,11.623 28.067,11.176 28.067,8.128 28.575,7.62 30.099,7.62 30.734,6.985 C6.2@33.147,6.985 ; 28.448,20.701 28.702,20.955 30.48,20.955 34.036,24.511 34.036,26.416 34.798,27.178 C14.1 C15.1 37.254,30.904 39.751,33.401 51.308,33.401
VREF: C5.2 C16.1 C17.2 N1.3 N5.1 N5.4 R17.2 R18.1 R25.1 | length 46.5
  Top Layer w0.61: C17.2 C16.1 28.128,30.711 N5.4 28.128,28.128 27.813,27.813 27.051,27.813 26.228,26.99 N5.1 26.228,24.661 R25.1 26.078,23.198 26.797,22.479 v1(30.226,22.479) ; v1(33.401,22.098) 33.401,18.796 34.755,17.442 C5.2 R18.1 38.143,16.086 38.313,16.256 42.672,16.256 43.477,15.451 43.477,13.886 ; N1.3 37.333,12.187 38.1,12.954 42.545,12.954 43.477,13.886 ; R17.2 43.477,13.886
  Bottom Layer w0.61: v1(30.226,22.479) 33.274,22.479 33.401,22.352 v1(33.401,22.098)
pads on no net: N1.1 N1.5 N1.8 N2.1 N2.5 N2.8 N4.1 N4.5 N4.8 X1. X1.1 X4.2 X4.4

## Polygon pours and split planes (outlines as drawn)
GND on Top Layer "Bottom Layer-No Net" (solid, remove dead copper, pour order 2): 0.127,35.814 0.127,0.127 64.135,0.127 64.135,35.814
GND on Bottom Layer "Bottom Layer-No Net" (solid, remove dead copper, pour order 0): 0.127,35.814 0.127,0.127 64.135,0.127 64.135,35.814

## Silkscreen, mask and mechanical layers (free items; w line width, h text height)
Mechanical 1:
  lines w0.254: 0,0 0,35.941 64.262,35.941 64.262,0 0,0

## Text inside footprints (layer, text, board x,y; h text height)
C1: Mechanical 23 "1" at 41.402,9.217 h0.8 r270; Mechanical 23 "2" at 41.402,6.853 h0.8 r270
C2: Mechanical 23 "1" at 14.986,21.189 h0.8 r270; Mechanical 23 "2" at 14.986,18.825 h0.8 r270
C3: Mechanical 23 "1" at 43.107,19.177 h0.8; Mechanical 23 "2" at 45.471,19.177 h0.8
C4: Mechanical 23 "1" at 29.918,17.78 h0.8 r180; Mechanical 23 "2" at 27.554,17.78 h0.8 r180
C5: Mechanical 23 "1" at 36.322,20.012 h0.8 r270; Mechanical 23 "2" at 36.322,17.648 h0.8 r270
C6: Mechanical 23 "1" at 32.639,9.598 h0.8 r270; Mechanical 23 "2" at 32.639,7.234 h0.8 r270
C7: Mechanical 23 "1" at 20.12,24.003 h0.8; Mechanical 23 "2" at 22.484,24.003 h0.8
C8: Mechanical 23 "1" at 56.134,6.804 h0.8 r270; Mechanical 23 "2" at 56.134,4.44 h0.8 r270
C9: Mechanical 23 "1" at 31.75,17.769 h0.8 r270; Mechanical 23 "2" at 31.75,15.405 h0.8 r270
C10: Mechanical 23 "1" at 42.037,14.786 h0.8 r90; Mechanical 23 "2" at 42.037,17.15 h0.8 r90
C11: Mechanical 23 "1" at 49.881,31.115 h0.8; Mechanical 23 "2" at 52.245,31.115 h0.8
C12: Mechanical 23 "1" at 51.531,21.071 h0.8; Mechanical 23 "2" at 53.895,21.071 h0.8
C13: Mechanical 23 "1" at 43.888,27.686 h0.8 r180; Mechanical 23 "2" at 41.524,27.686 h0.8 r180
C14: Mechanical 23 "1" at 36.884,26.67 h0.8; Mechanical 23 "2" at 39.248,26.67 h0.8
C15: Mechanical 23 "1" at 36.884,28.956 h0.8; Mechanical 23 "2" at 39.248,28.956 h0.8
C16: Mechanical 23 "1" at 28.648,31.369 h0.8 r180; Mechanical 23 "2" at 26.284,31.369 h0.8 r180
C17: Mechanical 23 "1" at 25.708,32.258 h0.8; Mechanical 23 "2" at 28.072,32.258 h0.8
C18: Mechanical 23 "1" at 24.638,26.216 h0.8 r90; Mechanical 23 "2" at 24.638,28.58 h0.8 r90
L1: Mechanical 23 "1" at 12.246,15.24 h0.8; Mechanical 23 "2" at 14.61,15.24 h0.8
R1: Mechanical 23 "1" at 15.186,10.16 h0.8 r180; Mechanical 23 "2" at 12.822,10.16 h0.8 r180
R2: Mechanical 23 "1" at 26.597,13.335 h0.8; Mechanical 23 "2" at 28.961,13.335 h0.8
R3: Mechanical 23 "1" at 15.186,12.065 h0.8 r180; Mechanical 23 "2" at 12.822,12.065 h0.8 r180
R4: Mechanical 23 "1" at 29.537,10.16 h0.8 r180; Mechanical 23 "2" at 27.173,10.16 h0.8 r180
R5: Mechanical 23 "1" at 15.186,8.255 h0.8 r180; Mechanical 23 "2" at 12.822,8.255 h0.8 r180
R6: Mechanical 23 "1" at 29.537,6.477 h0.8 r180; Mechanical 23 "2" at 27.173,6.477 h0.8 r180
R7: Mechanical 23 "1" at 12.065,5.915 h0.8 r270; Mechanical 23 "2" at 12.065,3.551 h0.8 r270
R8: Mechanical 23 "1" at 16.056,3.175 h0.8; Mechanical 23 "2" at 18.42,3.175 h0.8
R9: Mechanical 23 "1" at 25.473,4.191 h0.8 r180; Mechanical 23 "2" at 23.109,4.191 h0.8 r180
R10: Mechanical 23 "1" at 28.702,4.391 h0.8 r270; Mechanical 23 "2" at 28.702,2.027 h0.8 r270
R11: Mechanical 23 "1" at 44.831,6.277 h0.8 r90; Mechanical 23 "2" at 44.831,8.641 h0.8 r90
R12: Mechanical 23 "1" at 22.933,16.51 h0.8 r180; Mechanical 23 "2" at 20.569,16.51 h0.8 r180
R13: Mechanical 23 "1" at 29.918,20.193 h0.8 r180; Mechanical 23 "2" at 27.554,20.193 h0.8 r180
R14: Mechanical 23 "1" at 34.871,20.193 h0.8 r180; Mechanical 23 "2" at 32.507,20.193 h0.8 r180
R15: Mechanical 23 "1" at 41.856,20.193 h0.8 r180; Mechanical 23 "2" at 39.492,20.193 h0.8 r180
R16: Mechanical 23 "1" at 48.133,8.563 h0.8 r90; Mechanical 23 "2" at 48.133,10.927 h0.8 r90
R17: Mechanical 23 "1" at 45.212,16.456 h0.8 r270; Mechanical 23 "2" at 45.212,14.092 h0.8 r270
R18: Mechanical 23 "1" at 36.322,16.456 h0.8 r270; Mechanical 23 "2" at 36.322,14.092 h0.8 r270
R19: Mechanical 23 "1" at 17.526,33.347 h0.8 r270; Mechanical 23 "2" at 17.526,30.983 h0.8 r270
R20: Mechanical 23 "1" at 14.17,23.114 h0.8 r180; Mechanical 23 "2" at 11.806,23.114 h0.8 r180
R21: Mechanical 23 "1" at 46.047,24.384 h0.8 r180; Mechanical 23 "2" at 43.683,24.384 h0.8 r180
R22: Mechanical 23 "1" at 52.778,30.099 h0.8 r180; Mechanical 23 "2" at 50.414,30.099 h0.8 r180
R23: Mechanical 23 "1" at 11.23,26.289 h0.8; Mechanical 23 "2" at 13.594,26.289 h0.8
R24: Mechanical 23 "1" at 18.361,27.305 h0.8 r180; Mechanical 23 "2" at 15.997,27.305 h0.8 r180
R25: Mechanical 23 "1" at 25.708,24.003 h0.8; Mechanical 23 "2" at 28.072,24.003 h0.8
R26: Mechanical 23 "1" at 30.988,24.184 h0.8 r90; Mechanical 23 "2" at 30.988,26.548 h0.8 r90